# EAGLE board KissCart64-8K-DIP-Double (EAGLE 6.6.0)
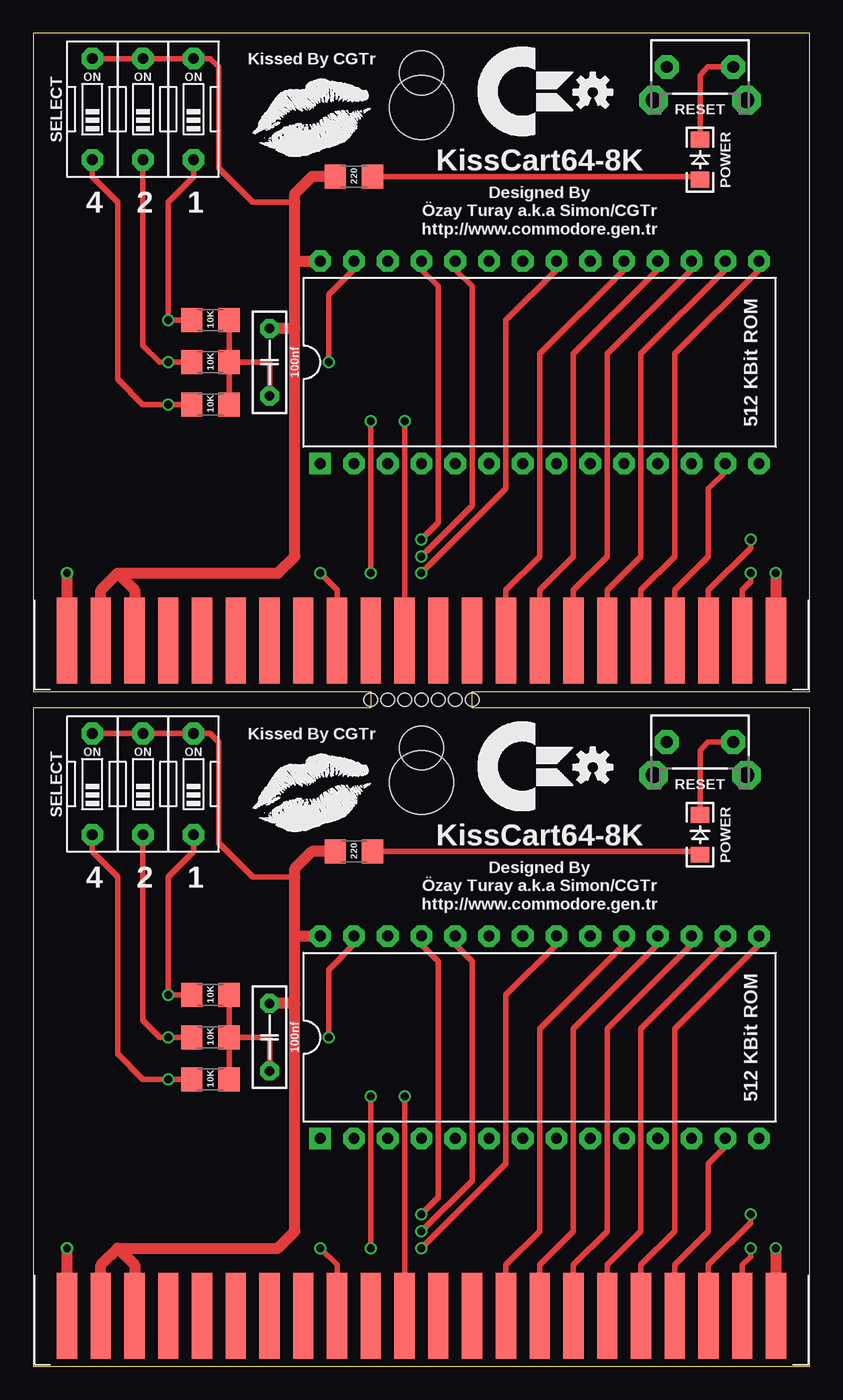
[diagram p0: board, top side]
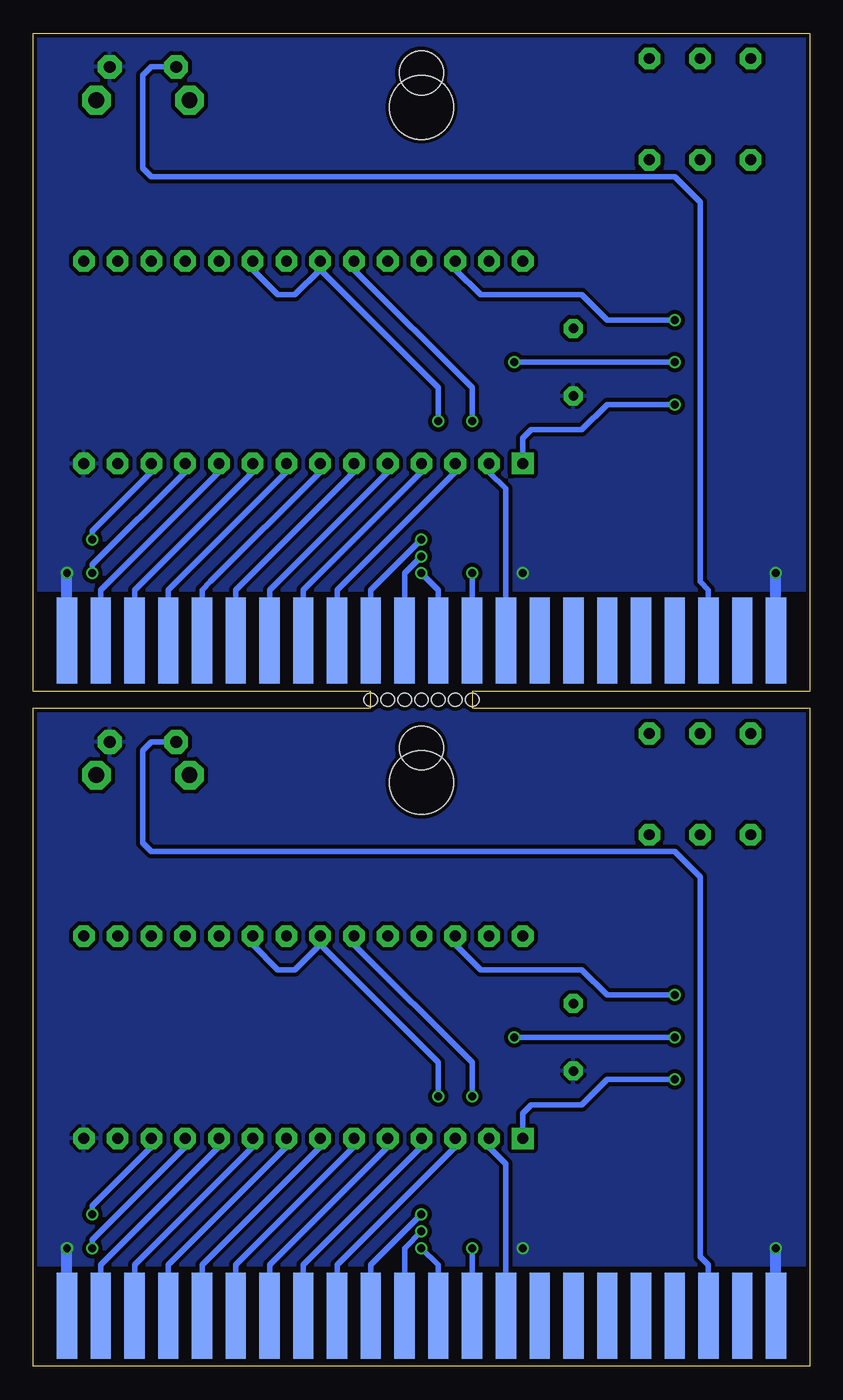
[diagram p1: board, bottom side, seen from below]

Size 58.42 x 100.33 mm. Coordinates in mm from the lower left corner, seen from the top.
Outline: 0,0 58.42,0 58.42,49.53 33.02,49.53 33.02,50.8 58.42,50.8 58.42,100.33 0,100.33 0,50.8 25.4,50.8 25.4,49.53 0,49.53 0,0
Copper layers (1*16): Top 0.035mm / dielectric 1.5mm / Bottom 0.035mm
Design rules "DirtyPCBs": minimum track width 5mil, minimum drill 12mil, track to track 5mil, track to pad 5mil, pad to pad 5mil, via to via 5mil, smd to smd 0mil, copper to edge 10mil, drill to drill 10mil, minimum pad ring 10mil, minimum via ring 6mil, stop-mask expansion 2mil, vias tented up to drill 25mil, thermal gap 10mil
Holes 4.8 mm at 29.21,43.94 29.21,94.74
Holes 3.3 mm at 29.21,46.54 29.21,97.34
Holes 1.02 mm at 29.21,50.16 30.48,50.16 31.75,50.16 33.02,50.16 27.94,50.16 26.67,50.16 25.4,50.16

## Footprints (pad centres in the part's own frame; a part is rotated, then mirrored left to right if it is on the bottom)
CAPACITOR_CERAMIC_0.2 = drill 0.711 pad 1.422 octagon: 1 -2.54,0; 2 2.54,0
C64_CARTRIDGE = smd 1.524 x 6.477: 1 -26.67,-0.635; 2 -24.13,-0.635; 3 -21.59,-0.635; 4 -19.05,-0.635; 5 -16.51,-0.635; 6 -13.97,-0.635; 7 -11.43,-0.635; 8 -8.89,-0.635; 9 -6.35,-0.635; 10 -3.81,-0.635; 11 -1.27,-0.635; 12 1.27,-0.635; 13 3.81,-0.635; 14 6.35,-0.635; 15 8.89,-0.635; 16 11.43,-0.635; 17 13.97,-0.635; 18 16.51,-0.635; 19 19.05,-0.635; 20 21.59,-0.635; 21 24.13,-0.635; 22 26.67,-0.635 | smd 1.524 x 6.477 bottom: A -26.67,-0.635; B -24.13,-0.635; C -21.59,-0.635; D -19.05,-0.635; E -16.51,-0.635; F -13.97,-0.635; H -11.43,-0.635; J -8.89,-0.635; K -6.35,-0.635; L -3.81,-0.635; M -1.27,-0.635; N 1.27,-0.635; P 3.81,-0.635; R 6.35,-0.635; S 8.89,-0.635; T 11.43,-0.635; U 13.97,-0.635; V 16.51,-0.635; W 19.05,-0.635; X 21.59,-0.635; Y 24.13,-0.635; Z 26.67,-0.635
DIP28W = drill 0.813 pad 1.626 square: 1 -16.51,-7.62 | drill 0.813 pad 1.626 octagon: 2 -13.97,-7.62; 3 -11.43,-7.62; 4 -8.89,-7.62; 5 -6.35,-7.62; 6 -3.81,-7.62; 7 -1.27,-7.62; 8 1.27,-7.62; 9 3.81,-7.62; 10 6.35,-7.62; 11 8.89,-7.62; 12 11.43,-7.62; 13 13.97,-7.62; 14 16.51,-7.62; 15 16.51,7.62; 16 13.97,7.62; 17 11.43,7.62; 18 8.89,7.62; 19 6.35,7.62; 20 3.81,7.62; 21 1.27,7.62; 22 -1.27,7.62; 23 -3.81,7.62; 24 -6.35,7.62; 25 -8.89,7.62; 26 -11.43,7.62; 27 -13.97,7.62; 28 -16.51,7.62
LED_1206 = smd 1.2 x 1.4: A -1.5,0; C 1.5,0
RESISTOR_SMT_1206 = smd 1.6 x 1.8: 1 -1.4,0; 2 1.4,0
SWITCH_THT_SIDE = drill 0.889 pad 1.778 octagon: 1 -2.5,0; 2 2.5,0 | drill 1.194 pad 2.159 octagon: ANCHOR1 -3.5,2.5; ANCHOR2 3.5,2.5
SWITCH_DIP_01 = drill 0.813 pad 1.626 octagon: 1 0,-3.81; 2 0,3.81

## Placement (x,y rotation side)
C1  100nf  [CAPACITOR_CERAMIC_0.2]  17.78,24.77 90 top
C2  100nf  [CAPACITOR_CERAMIC_0.2]  17.78,75.56 90 top
CONN1  C64 EXPANSION  [C64_CARTRIDGE]  29.21,4.45 0 top
CONN2  C64 EXPANSION  [C64_CARTRIDGE]  29.21,55.24 0 top
IC1  512 KBit ROM  [DIP28W]  38.1,24.77 0 top
IC2  512 KBit ROM  [DIP28W]  38.1,75.56 0 top
LED0  POWER  [LED_1206]  50.16,40.01 90 top
LED1  POWER  [LED_1206]  50.16,90.81 90 top
LOGO1  OSHW_LOGO_SMALL  [OSHW_LOGO_SMALL]  42.1,45.09 0 top
LOGO2  OSHW_LOGO_SMALL  [OSHW_LOGO_SMALL]  42.1,95.89 0 top
R0  220  [RESISTOR_SMT_1206]  24.13,38.73 0 top
R1  220  [RESISTOR_SMT_1206]  24.13,89.53 0 top
R2  10K  [RESISTOR_SMT_1206]  13.34,78.74 0 top
R3  10K  [RESISTOR_SMT_1206]  13.34,75.56 0 top
R4  10K  [RESISTOR_SMT_1206]  13.34,72.39 0 top
R13  10K  [RESISTOR_SMT_1206]  13.34,27.94 0 top
R14  10K  [RESISTOR_SMT_1206]  13.34,24.77 0 top
R15  10K  [RESISTOR_SMT_1206]  13.34,21.59 0 top
SW0  RESET  [SWITCH_THT_SIDE]  50.16,46.99 180 top
SW1  1  [SWITCH_DIP_01]  12.06,43.81 0 top
SW2  2  [SWITCH_DIP_01]  8.26,43.81 0 top
SW3  RESET  [SWITCH_THT_SIDE]  50.16,97.79 180 top
SW4  4  [SWITCH_DIP_01]  4.45,43.81 0 top
SW5  1  [SWITCH_DIP_01]  12.06,94.61 0 top
SW6  2  [SWITCH_DIP_01]  8.26,94.61 0 top
SW7  4  [SWITCH_DIP_01]  4.45,94.61 0 top

## Library data of the parts
C1 C2 LED0 LED1 LOGO1 LOGO2 R0 R1-R4 R13-R15 SW0 SW1-SW7 = sj_standart
CONN1 CONN2 = sj_commodore
IC1 IC2 = sj_ic

## Nets
A0: CONN1.Y IC1.10
A1: CONN1.X IC1.9
A2: CONN1.W IC1.8
A3: CONN1.V IC1.7
A4: CONN1.U IC1.6
A5: CONN1.T IC1.5
A6: CONN1.S IC1.4
A7: CONN1.R IC1.3
A8: CONN1.P IC1.25
A9: CONN1.N IC1.24
A10: CONN1.M IC1.21
A11: CONN1.L IC1.23
A12: CONN1.K IC1.2
A13: IC1.26 R13.1 SW1.1
A14: IC1.27 R14.1 SW2.1
A15: IC1.1 R15.1 SW4.1
A16: CONN2.Y IC2.10
A17: CONN2.X IC2.9
A18: CONN2.W IC2.8
A19: CONN2.V IC2.7
A20: CONN2.U IC2.6
A21: CONN2.T IC2.5
A22: CONN2.S IC2.4
A23: CONN2.R IC2.3
A24: CONN2.P IC2.25
A25: CONN2.N IC2.24
A26: CONN2.M IC2.21
A27: CONN2.L IC2.23
A28: CONN2.K IC2.2
A29: IC2.1 R4.1 SW7.1
A30: IC2.27 R3.1 SW6.1
A31: IC2.26 R2.1 SW5.1
D0: CONN1.21 IC1.11
D1: CONN1.20 IC1.12
D2: CONN1.19 IC1.13
D3: CONN1.18 IC1.15
D4: CONN1.17 IC1.16
D5: CONN1.16 IC1.17
D6: CONN1.15 IC1.18
D7: CONN1.14 IC1.19
D8: CONN2.21 IC2.11
D9: CONN2.20 IC2.12
D10: CONN2.19 IC2.13
D11: CONN2.18 IC2.15
D12: CONN2.17 IC2.16
D13: CONN2.16 IC2.17
D14: CONN2.15 IC2.18
D15: CONN2.14 IC2.19
GND: C1.1 CONN1.1 CONN1.9 CONN1.22 CONN1.A CONN1.Z IC1.14 LED0.C R13.2 R14.2 R15.2 SW0.1
GND1: C2.1 CONN2.1 CONN2.9 CONN2.22 CONN2.A CONN2.Z IC2.14 LED1.C R2.2 R3.2 R4.2 SW3.1
LED0_1: LED0.A R0.2
LED0_2: LED1.A R1.2
RESET: CONN1.C SW0.2
RESET1: CONN2.C SW3.2
ROML: CONN1.11 IC1.20 IC1.22
ROML1: CONN2.11 IC2.20 IC2.22
VCC: C1.2 CONN1.2 CONN1.3 IC1.28 R0.1 SW1.2 SW2.2 SW4.2
VCC1: C2.2 CONN2.2 CONN2.3 IC2.28 R1.1 SW5.2 SW6.2 SW7.2

## Tracks (layer width: path | path; a pad name or v marks a point on that pad's centre or on a via)
A0
  Bottom 0.406: IC1.10 44.45,16.51 53.34,7.62 CONN1.Y
A1
  Bottom 0.406: IC1.9 41.91,16.51 50.8,7.62 50.8,6.99 CONN1.X
A2
  Bottom 0.406: IC1.8 39.37,16.51 48.26,7.62 48.26,6.99 CONN1.W
A3
  Bottom 0.406: IC1.7 36.83,16.51 45.09,8.26 45.72,7.62 45.72,6.99 CONN1.V
A4
  Bottom 0.406: IC1.6 34.29,16.51 43.18,7.62 43.18,6.99 CONN1.U
A5
  Bottom 0.406: IC1.5 31.75,16.51 40.64,7.62 40.64,6.99 CONN1.T
A6
  Bottom 0.406: IC1.4 29.21,16.51 38.1,7.62 38.1,6.99 CONN1.S
A7
  Bottom 0.406: IC1.3 26.67,16.51 35.56,7.62 CONN1.R
A8  (via drill 0.6)
  Top 0.406: IC1.25 29.21,31.75 30.48,30.48 30.48,12.7 v29.21,11.43
  Bottom 0.406: v29.21,11.43 33.02,7.62 CONN1.P
A9  (via drill 0.6)
  Top 0.406: IC1.24 31.75,31.75 33.02,30.48 33.02,13.97 v29.21,10.16
  Bottom 0.406: v29.21,10.16 30.48,8.89 CONN1.N
A10  (via drill 0.6)
  Top 0.406: IC1.21 39.37,31.75 35.56,27.94 35.56,15.24 v29.21,8.89
  Bottom 0.406: v29.21,8.89 27.94,7.62 CONN1.M
A11  (via drill 0.6)
  Top 0.406: v25.4,20.32 v25.4,8.89
  Bottom 0.406: IC1.23 34.29,31.75 25.4,22.86 v25.4,20.32 | v25.4,8.89 CONN1.L
A12
  Bottom 0.406: IC1.2 24.13,16.51 22.86,15.24 CONN1.K
A13  (via drill 0.6)
  Top 0.406: R13.1 v10.16,27.94 10.16,36.83 12.06,38.73 SW1.1
  Bottom 0.406: IC1.26 26.67,31.75 24.77,29.84 17.14,29.84 15.24,27.94 v10.16,27.94
A14  (via drill 0.6)
  Top 0.406: IC1.27 24.13,31.75 22.23,29.84 v22.23,24.77 | R14.1 v10.16,24.77 9.53,24.77 8.26,26.04 SW2.1
  Bottom 0.406: v22.23,24.77 v10.16,24.77
A15  (via drill 0.6)
  Top 0.406: R15.1 v10.16,21.59 8.26,21.59 6.35,23.5 6.35,36.83 4.45,38.73 SW4.1
  Bottom 0.406: IC1.1 21.59,19.05 20.95,19.68 17.14,19.68 15.24,21.59 v10.16,21.59
A16
  Bottom 0.406: IC2.10 44.45,67.31 53.34,58.42 CONN2.Y
A17
  Bottom 0.406: IC2.9 41.91,67.31 50.8,58.42 50.8,57.78 CONN2.X
A18
  Bottom 0.406: IC2.8 39.37,67.31 48.26,58.42 48.26,57.78 CONN2.W
A19
  Bottom 0.406: IC2.7 36.83,67.31 45.09,59.05 45.72,58.42 45.72,57.78 CONN2.V
A20
  Bottom 0.406: IC2.6 34.29,67.31 43.18,58.42 43.18,57.78 CONN2.U
A21
  Bottom 0.406: IC2.5 31.75,67.31 40.64,58.42 40.64,57.78 CONN2.T
A22
  Bottom 0.406: IC2.4 29.21,67.31 38.1,58.42 38.1,57.78 CONN2.S
A23
  Bottom 0.406: IC2.3 26.67,67.31 35.56,58.42 CONN2.R
A24  (via drill 0.6)
  Top 0.406: IC2.25 29.21,82.55 30.48,81.28 30.48,63.5 v29.21,62.23
  Bottom 0.406: v29.21,62.23 33.02,58.42 CONN2.P
A25  (via drill 0.6)
  Top 0.406: IC2.24 31.75,82.55 33.02,81.28 33.02,64.77 v29.21,60.96
  Bottom 0.406: v29.21,60.96 30.48,59.69 CONN2.N
A26  (via drill 0.6)
  Top 0.406: IC2.21 39.37,82.55 35.56,78.74 35.56,66.04 v29.21,59.69
  Bottom 0.406: v29.21,59.69 27.94,58.42 CONN2.M
A27  (via drill 0.6)
  Top 0.406: v25.4,71.12 v25.4,59.69
  Bottom 0.406: IC2.23 34.29,82.55 25.4,73.66 v25.4,71.12 | v25.4,59.69 CONN2.L
A28
  Bottom 0.406: IC2.2 24.13,67.31 22.86,66.04 CONN2.K
A29  (via drill 0.6)
  Top 0.406: R4.1 v10.16,72.39 8.26,72.39 6.35,74.3 6.35,87.63 4.45,89.53 SW7.1
  Bottom 0.406: IC2.1 21.59,69.85 20.95,70.48 17.14,70.48 15.24,72.39 v10.16,72.39
A30  (via drill 0.6)
  Top 0.406: IC2.27 24.13,82.55 22.23,80.64 v22.23,75.56 | R3.1 v10.16,75.56 9.53,75.56 8.26,76.83 SW6.1
  Bottom 0.406: v22.23,75.56 v10.16,75.56
A31  (via drill 0.6)
  Top 0.406: R2.1 v10.16,78.74 10.16,87.63 12.06,89.53 SW5.1
  Bottom 0.406: IC2.26 26.67,82.55 24.77,80.64 17.14,80.64 15.24,78.74 v10.16,78.74
D0  (via drill 0.6)
  Top 0.406: v53.98,8.89 53.98,8.26 53.34,7.62 CONN1.21
  Bottom 0.406: IC1.11 46.99,16.51 53.98,9.53 v53.98,8.89
D1  (via drill 0.6)
  Top 0.406: v53.98,11.43 53.98,10.79 50.8,7.62 CONN1.20
  Bottom 0.406: IC1.12 49.53,16.51 53.98,12.06 v53.98,11.43
D2
  Top 0.406: IC1.13 52.07,16.51 50.8,15.24 50.8,10.16 48.26,7.62 CONN1.19
D3
  Top 0.406: IC1.15 54.61,31.75 48.26,25.4 48.26,10.16 45.72,7.62 CONN1.18
D4
  Top 0.406: IC1.16 52.07,31.75 45.72,25.4 45.72,10.16 43.18,7.62 CONN1.17
D5
  Top 0.406: IC1.17 49.53,31.75 43.18,25.4 43.18,10.16 40.64,7.62 CONN1.16
D6
  Top 0.406: IC1.18 46.99,31.75 40.64,25.4 40.64,10.16 38.1,7.62 CONN1.15
D7
  Top 0.406: IC1.19 44.45,31.75 38.1,25.4 38.1,10.16 35.56,7.62 CONN1.14
D8  (via drill 0.6)
  Top 0.406: v53.98,59.69 53.98,59.05 53.34,58.42 CONN2.21
  Bottom 0.406: IC2.11 46.99,67.31 53.98,60.33 v53.98,59.69
D9  (via drill 0.6)
  Top 0.406: v53.98,62.23 53.98,61.59 50.8,58.42 CONN2.20
  Bottom 0.406: IC2.12 49.53,67.31 53.98,62.87 v53.98,62.23
D10
  Top 0.406: IC2.13 52.07,67.31 50.8,66.04 50.8,60.96 48.26,58.42 CONN2.19
D11
  Top 0.406: IC2.15 54.61,82.55 48.26,76.2 48.26,60.96 45.72,58.42 CONN2.18
D12
  Top 0.406: IC2.16 52.07,82.55 45.72,76.2 45.72,60.96 43.18,58.42 CONN2.17
D13
  Top 0.406: IC2.17 49.53,82.55 43.18,76.2 43.18,60.96 40.64,58.42 CONN2.16
D14
  Top 0.406: IC2.18 46.99,82.55 40.64,76.2 40.64,60.96 38.1,58.42 CONN2.15
D15
  Top 0.406: IC2.19 44.45,82.55 38.1,76.2 38.1,60.96 35.56,58.42 CONN2.14
GND  (via drill 0.6)
  Top 0.406: CONN1.9 22.86,7.62 v21.59,8.89 | LED0.C 50.16,46.35 50.76,46.99 SW0.1 | 15.24,22.23 15.24,21.59 R15.2 R14.2 | C1.1 17.78,24.77 R14.2 | R14.2 R13.2
  Top 0.813: v2.54,8.89 CONN1.A | v55.88,8.89 CONN1.Z
  Bottom 0.813: CONN1.A v2.54,8.89 | CONN1.Z v55.88,8.89
  pour Bottom (isolate 0.305): 0,7.62 58.42,7.62 58.42,49.53 0,49.53
GND1  (via drill 0.6)
  Top 0.406: CONN2.9 22.86,58.42 v21.59,59.69 | LED1.C 50.16,97.16 50.76,97.79 SW3.1 | 15.24,73.03 15.24,72.39 R4.2 R3.2 | C2.1 17.78,75.56 R3.2 | R3.2 R2.2
  Top 0.813: v2.54,59.69 CONN2.A | v55.88,59.69 CONN2.Z
  Bottom 0.813: CONN2.A v2.54,59.69 | CONN2.Z v55.88,59.69
  pour Bottom (isolate 0.305): 0,58.42 58.42,58.42 58.42,100.33 0,100.33
LED0_1
  Top 0.406: R0.2 50.16,38.73 LED0.A
LED0_2
  Top 0.406: R1.2 50.16,89.53 LED1.A
RESET
  Bottom 0.406: 48.9,46.99 SW0.2 49.53,46.99 50.16,46.35 50.16,39.37 49.53,38.73 10.16,38.73 8.26,36.83 8.26,8.26 7.62,7.62 CONN1.C
RESET1
  Bottom 0.406: 48.9,97.79 SW3.2 49.53,97.79 50.16,97.16 50.16,90.17 49.53,89.53 10.16,89.53 8.26,87.63 8.26,59.05 7.62,58.42 CONN2.C
ROML  (via drill 0.6)
  Top 0.406: v27.94,20.32 CONN1.11
  Bottom 0.406: 36.83,31.75 38.73,29.84 40.01,29.84 41.91,31.75 IC1.20 | 36.83,31.75 27.94,22.86 v27.94,20.32 | IC1.22 36.83,31.75
ROML1  (via drill 0.6)
  Top 0.406: v27.94,71.12 CONN2.11
  Bottom 0.406: 36.83,82.55 38.73,80.64 40.01,80.64 41.91,82.55 IC2.20 | 36.83,82.55 27.94,73.66 v27.94,71.12 | IC2.22 36.83,82.55
VCC
  Top 0.406: C1.2 | SW4.2 SW2.2 SW1.2 13.34,47.62 13.97,46.99 13.97,39.37 16.51,36.83 19.68,36.83
  Top 0.813: CONN1.3 7.62,7.62 6.35,8.89 | CONN1.2 5.08,7.62 6.35,8.89 | 19.68,27.3 19.68,10.16 18.41,8.89 6.35,8.89 | 19.68,27.3 C1.2 | 19.68,27.3 19.68,32.38 | 19.68,32.38 IC1.28 | R0.1 20.95,38.73 19.68,37.47 19.68,36.83 19.68,32.38
VCC1
  Top 0.406: 17.77,78.1 C2.2 | SW7.2 SW6.2 SW5.2 13.34,98.42 13.97,97.79 13.97,90.17 16.51,87.63 19.68,87.63
  Top 0.813: CONN2.3 7.62,58.42 6.35,59.69 | CONN2.2 5.08,58.42 6.35,59.69 | 19.68,78.11 19.68,60.96 18.41,59.69 6.35,59.69 | 19.68,78.11 C2.2 | 19.68,78.11 19.68,83.19 | 19.68,83.19 IC2.28 | R1.1 20.95,89.53 19.68,88.27 19.68,87.63 19.68,83.19

## Text on the board
tPlace: Kissed By CGTr | SELECT | KissCart64-8K | Designed By / Özay Turay a.k.a Simon/CGTr / http://www.commodore.gen.tr | Kissed By CGTr | SELECT | KissCart64-8K | Designed By / Özay Turay a.k.a Simon/CGTr / http://www.commodore.gen.tr